# Altium PCB PCB2_third.PCBDOC (part 1 of 3)
Units mil, origin at the board's own origin, x right, y up, seen from the top; angles counter-clockwise.
Board outline 6000 x 4000 mil, 2 copper layers (Top Layer, Bottom Layer); 72 components, 143 nets, 481 pads, 207 vias.
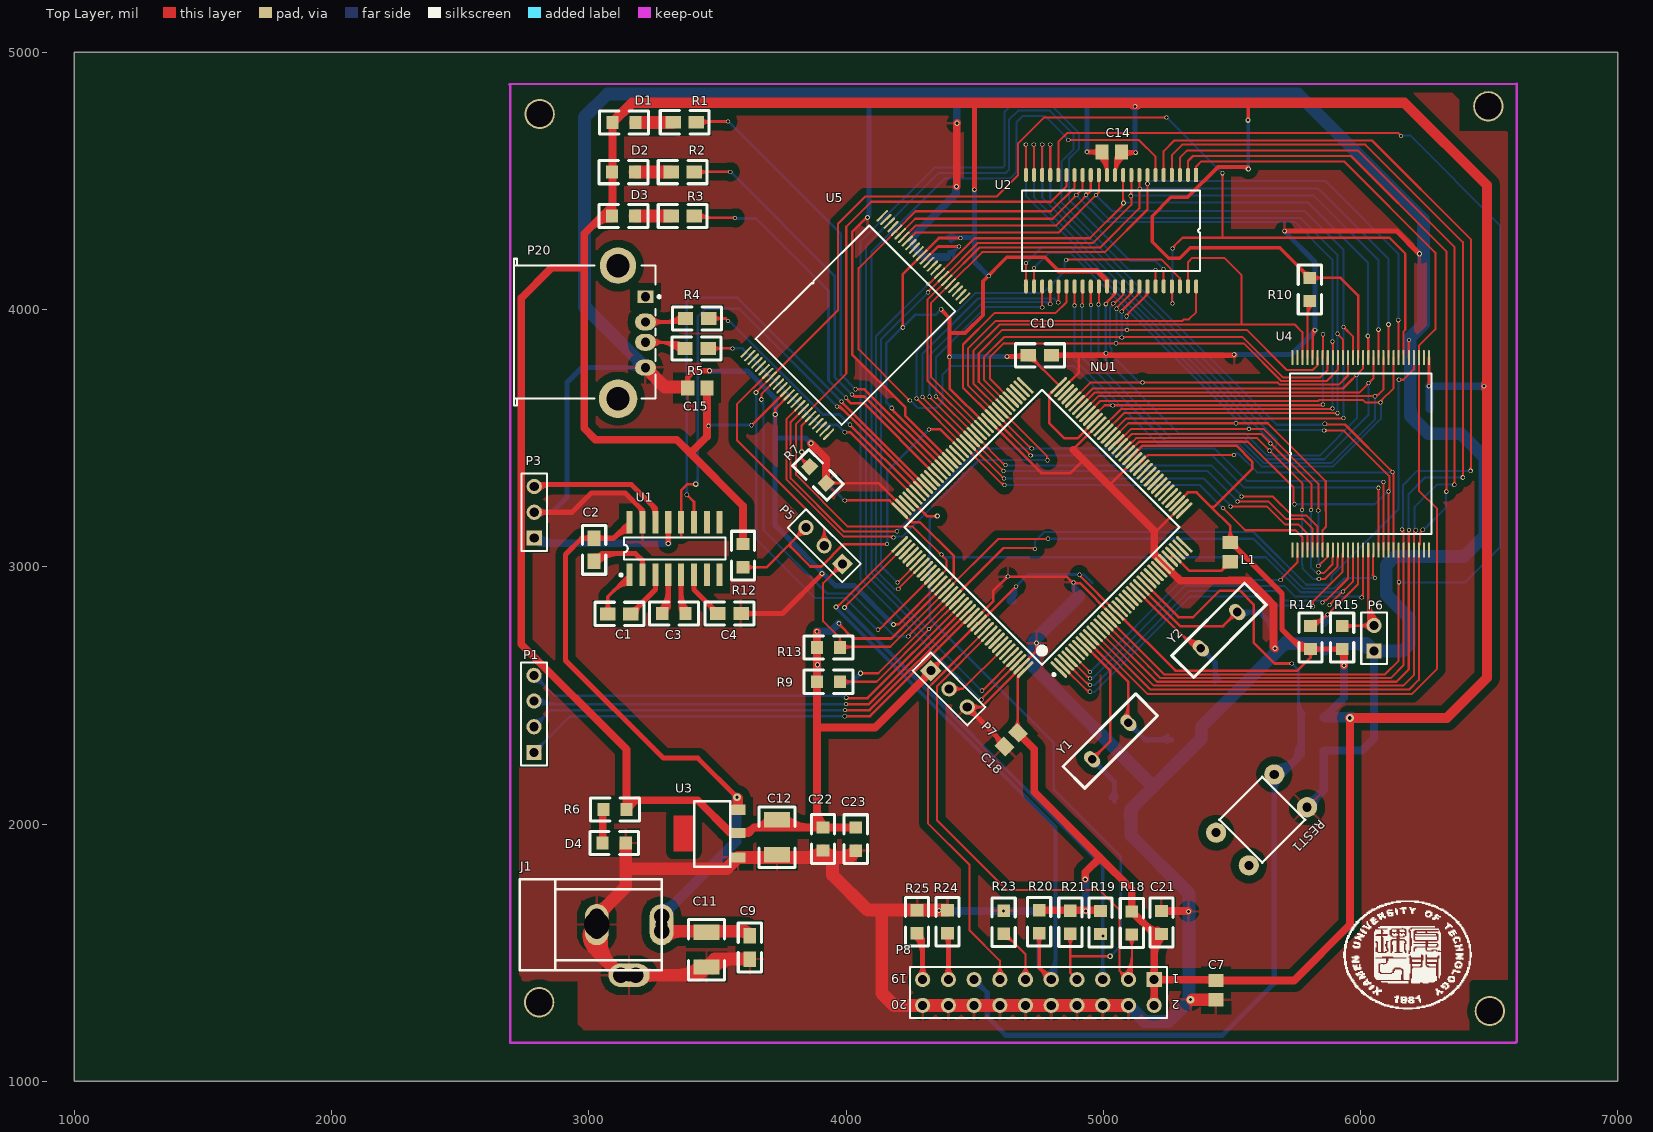
[diagram p0: Top Layer view]
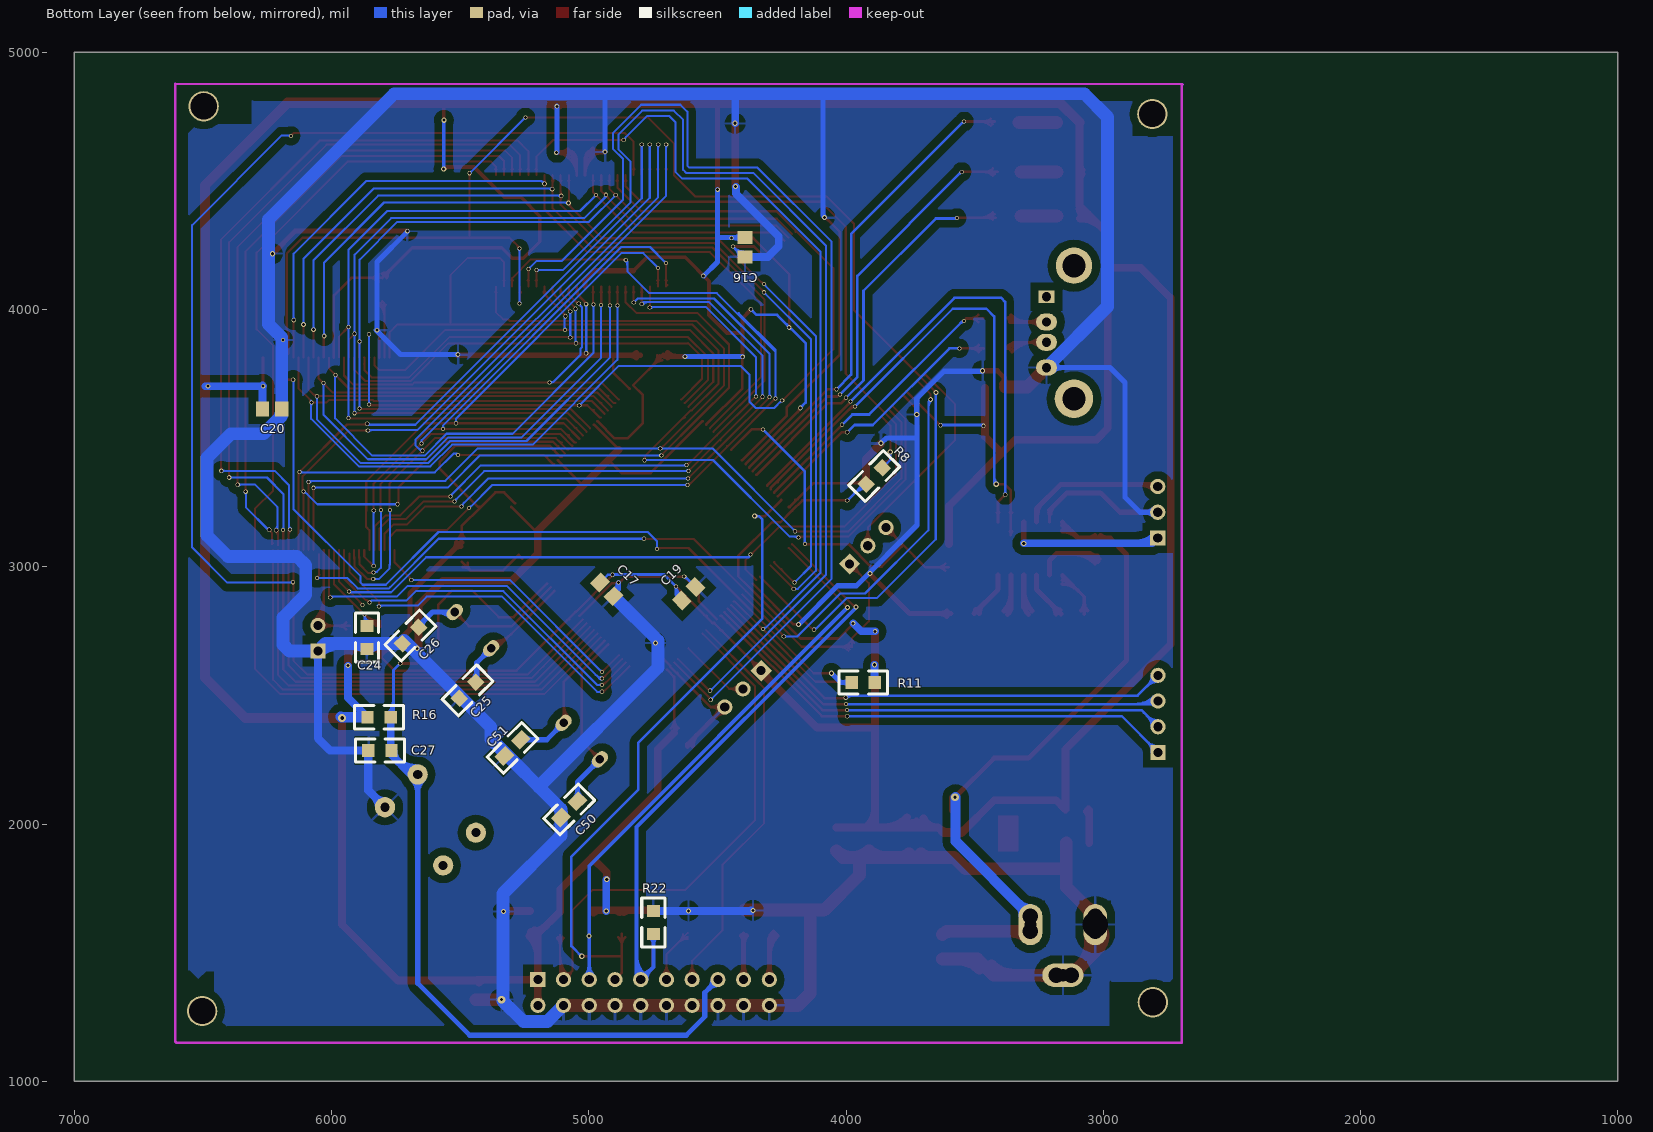
[diagram p1: Bottom Layer view, seen from below]

## Layer stack, top to bottom
Top Layer: signal copper 1.4
Dielectric: core 12.6, FR-4, Dk 4.8
Bottom Layer: signal copper 1.4

## Board outline
1000,1000 7000,1000 7000,5000 1000,5000

## Design rules (kind name [scope] priority, off if disabled: settings)
Clearance [All] p1: gap=6
ComponentClearance [All] p1: gap=10 collisioncheckmode=3 verticalgap=10
PolygonConnect [All] p1: connectstyle=Relief reliefconductorwidth=10 reliefentries=4 polygonreliefangle="90 Angle"
RoutingVias [All] p1: holewidth=28 width=50 viastyle="Through Hole" minholewidth=28 minwidth=50 maxholewidth=28 maxwidth=50
SolderMaskExpansion [All] p1: expansion=4
TestPointUsage [All] p1: valid=0 allowmultiple=FALSE
Testpoint [All] p1: side=15 testpointundercomponent=TRUE minsize=40 maxsize=100 preferedsize=60 minholesize=0 maxholesize=40 preferedholesize=32 testpointgrid=1 style=1023 order=0123456789
Width [All] p1: maxlimit=50 minlimit=6 preferedwidth=10 minimp=50.000000 maximp=50.000000 favimp=50.000000
18 further rules are at their usual default settings.

## Classes and differential pairs
net class R3_Nets: NetD3_2 PC8
net class R2_Nets: NetD2_2 PC7
net class R1_Nets: NetD1_2 PC6
net class R19_Nets: PA15 VDD33
net class U4_Nets: A0 A1 A2 A3 A4 A5 A6 A7 A8 A9 A10 A11 A12 A13 A14 A15 A16 A17 A18 A19 A20 A21 A22 D0 D1 D2 D3 D4 D5 D6 D7 D8 D9 D10 D11 D12 D13 D14 D15 GND NetC24_1 NetP6_2 NetR10_1 NetU4_1 NetU4_27 NetU4_28 NetU4_30 NetU4_55 NetU4_56 PD4 PD5 PD6 PG9 VDD33
net class D[0..15]: AD0 AD1 AD2 AD3 AD4 AD5 AD6 AD7 AD8 AD9 AD10 AD11 AD12 AD13 AD14 AD15 AD16 AD17 AD18 AD19 AD20 AD21 AD22 AD23 D0 D1 D2 D3 D4 D5 D6 D7 D8 D9 D10 D11 D12 D13 D14 D15 DATA0 DATA1 DATA2 DATA3 DATA4 DATA5 DATA6 DATA7 DATA8 DATA9 DATA10 DATA11 DATA12 DATA13 DATA14 DATA15 NetU4_1 NetU4_27 NetU4_28 NetU4_30 NetU4_55 NetU4_56
net class U5_Nets: A16 A17 D0 D1 D2 D3 D4 D5 D6 D7 GND NetP5_2 NetR7_1 PD4 PD5 PD7 VDD33
net class A[0..23]: A0 A1 A2 A3 A4 A5 A6 A7 A8 A9 A10 A11 A12 A13 A14 A15 A16 A17 A18 A19 A20 A21 A22 A23 NetU4_1 NetU4_27 NetU4_28 NetU4_30 NetU4_55 NetU4_56
net class U3_Nets: GND VDD5 VDD33
net class U2_Nets: A0 A1 A2 A3 A4 A5 A6 A7 A8 A9 A10 A11 A12 A13 A14 A15 A16 A17 A18 D0 D1 D2 D3 D4 D5 D6 D7 D8 D9 D10 D11 D12 D13 D14 D15 GND PD4 PD5 PE0 PE1 PG10 VDD33
net class REST1_Nets: GND NRST
net class R25_Nets: GND NetP8_19
net class R24_Nets: GND NetP8_17
net class R23_Nets: GND NetP8_11
net class R22_Nets: GND PA14
net class R21_Nets: PA13 VDD33
net class R20_Nets: PA14 VDD33
net class R18_Nets: PB4 VDD33
net class R16_Nets: NRST VDD33
net class R15_Nets: NetP6_2 VDD33
net class R14_Nets: NetC24_1 VDD33
net class R13_Nets: PD6 VDD33
net class R12_Nets: PG6 VDD33
net class R11_Nets: PG9 VDD33
net class R10_Nets: NetR10_1 VDD33
net class R9_Nets: PG10 VDD33
net class R8_Nets: NetR7_1 VDD33
net class R7_Nets: GND NetR7_1
net class R6_Nets: NetD4_1 VDD33
net class R5_Nets: NetP20_3 PA12
net class R4_Nets: NetP20_2 PA11
net class P20_Nets: GND NetP20_2 NetP20_3 NetP20_5 NetP20_6 "USB 5V"
net class P8_Nets: GND NetP8_11 NetP8_17 NetP8_19 NRST PA13 PA14 PA15 PB3 PB4 VDD33
net class P7_Nets: BOOT0 GND VDD33
net class P6_Nets: GND NetP6_2
net class P5_Nets: NetP5_2 PD6 PG6
net class P3_Nets: GND R1IN T1OUT
net class NU1_Nets: A0 A1 A2 A3 A4 A5 A6 A7 A8 A9 A10 A11 A12 A13 A14 A15 A16 A17 A18 A19 A20 A21 A22 A23 BOOT0 D0 D1 D2 D3 D4 D5 D6 D7 D8 D9 D10 D11 D12 D13 D14 D15 GND LED0 LED1 LED2 NetL1_1 NetNU1_6 NetNU1_106 NRST OSCIN OSCOUT PA0 PA1 PA2 PA3 PA4 PA5 PA6 PA7 PA8 PA9 PA10 PA11 PA12 PA13 PA14 PA15 PB0 PB1 PB2 PB3 PB4 PB5 PB6 PB7 PB8 PB9 PB10 PB11 PB12 PB13 PB14 PB15 PC0 PC1 PC2 PC3 PC4 PC5 PC6 PC7 PC8 PC9 PC10 PC11 PC12 PC13 PC14 PC15 PD2 PD3 PD4 PD5 PD6 PD7 PE0 PE1 PF6 PF10 PF11 PG6 PG7 PG8 PG9 PG10 PG11 PG12 PG13 PG14 PG15 VDD33
net class L1_Nets: NetL1_1 VDD33
net class J1_Nets: GND VDD5
net class D4_Nets: GND NetD4_1
net class D3_Nets: NetD3_2 VDD33
net class D2_Nets: NetD2_2 VDD33
net class D1_Nets: NetD1_2 VDD33
net class C27_Nets: GND NRST
net class C25_Nets: GND OSCIN
net class C24_Nets: GND NetC24_1
net class C23_Nets: GND VDD33
net class C22_Nets: GND VDD33
net class C21_Nets: GND VDD33
net class C20_Nets: GND VDD33
net class C19_Nets: GND VDD33
net class C18_Nets: GND VDD33
net class C17_Nets: GND VDD33
net class C16_Nets: GND VDD33
net class C15_Nets: GND VDD33
net class C14_Nets: GND VDD33
net class C12_Nets: GND VDD33
net class C11_Nets: GND VDD5
net class C10_Nets: GND VDD33
net class C9_Nets: GND VDD5
net class C7_Nets: GND VDD33
net class C3_Nets: NetC3_1 NetC3_2
net class C1_Nets: NetC1_1 NetC1_2
component class "XLAT AND JTAG": C25 C26 C27 P7 P8 R16 R18 R19 R20 R21 R22 R23 R24 R25 REST1 Y2
component class STORAGE: C21 C22 C23 C24 P5 P6 R7 R8 R9 R10 R11 R12 R13 R14 R15 U2 U4 U5
component class POWER: C7 C9 C10 C11 C12 C14 C15 C16 C17 C18 C19 C20 D4 J1 L1 NU1 R6 U3
component class EXTERN: 1 C1 C2 C3 C4 D1 D2 D3 P1 P3 P20 R1 R2 R3 R4 R5 U1
net class C2_Nets: NetC2_2 VDD5
net class C4_Nets: GND NetC4_1
net class U1_Nets: GND NetC1_1 NetC1_2 NetC2_2 NetC3_1 NetC3_2 NetC4_1 NetU1_7 NetU1_8 NetU1_9 NetU1_10 PA9 PA10 R1IN T1OUT VDD5
net class C26_Nets: GND OSCOUT
net class Y2_Nets: OSCIN OSCOUT
component class GPIO_OUT: C50 C51 Y1
net class C50_Nets: GND PC14
net class C51_Nets: GND PC15
net class Y1_Nets: PC14 PC15
net class P1_Nets: PG11 PG12 PG13 PG14

## Components (designator, comment, footprint, x,y, rotation, side; value= is the part's Value field where it differs from the comment)
C1 "0.1uF" 0805#1 3074,2817 r0 top
C2 "0.1uF" 0805#1 3021,3111 r270 top
C3 "0.1uF" 0805#2 3376,2818 r180 top
C4 "0.1uF" 0805#1 3502,2818 r0 top
C7 "Cap" 6-0805 5438,1354 r90 top
C9 "102" 0805#1 3626,1565 r270 top
C10 "102" 0805#1 4709,3822 r0 top
C11 "2.2uf" 1210 3458,1579 r270 top
C12 "2.2uf" 1210 3732,2016 r270 top
C14 "Cap" 6-0805 5033,4612 r0 top
C15 "Cap" 6-0805 3422,3695 r0 top
C16 "Cap" 6-0805 4393,4242 r90 bottom
C17 "Cap" 6-0805 4930,2912 r45 bottom
C18 "Cap" 6-0805 4642,2328 r45 top
C19 "Cap" 6-0805 4612,2895 r315 bottom
C20 "Cap" 6-0805 6231,3613 r0 bottom
C21 "Cap" 0805#2 5227,1572 r90 top
C22 "Cap" 0805#2 3911,1987 r270 top
C23 "Cap" 0805#2 4038,1986 r270 top
C24 "Cap" 0805#2 5862,2770 r270 bottom
C25 "Cap" 0805#2 5503,2488 r135 bottom
C26 "Cap" 0805#2 5725,2701 r135 bottom
C27 "Cap" 0805#2 5857,2286 r180 bottom
C50 "Cap" 0805#1 5108,2025 r135 bottom
C51 "Cap" 0805#1 5328,2264 r135 bottom
D1 "LED0" 0805#2 3092,4727 r0 top
D2 "LED0" 0805#2 3090,4534 r0 top
D3 "LED0" 0805#2 3090,4364 r0 top
D4 "LED3" 0805#2 3054,1926 r0 top
J1 "PWR2.5" Power_In 3013,1699 r0 top
L1 "Inductor" 6-0805 5494,3057 r90 top
NU1 "STM32F103ZET6" LQFN144 4762,3153 r135 top
P1 "Header 4" HDR1X4 2787,2278 r90 top
P3 "Header 3" HDR1X3 2788,3112 r90 top
P5 "Header 3" HDR1X3 3986,3011 r135 top
P6 "Header 2" HDR1X2 6053,2672 r90 top
P7 "Header 3" HDR1X3 4330,2596 r315 top
P8 "Header 10X2" HDR2X10 5198,1395 r180 top
P20 "P10" 787616 2709,3912 r180 top
R1 "Res2" 0805#1 3418,4728 r180 top
R2 "Res2" 0805#1 3410,4534 r180 top
R3 "Res2" 0805#1 3410,4364 r180 top
R4 "Res2" 0805#1 3376,3965 r0 top
R5 "Res2" 0805#1 3374,3848 r0 top
R6 "Res2" 0805#2 3057,2056 r0 top
R7 "Res2" 0805#2 3859,3389 r315 top
R8 "Res2" 0805#2 3922,3321 r135 bottom
R9 "Res2" 0805#2 3977,2553 r180 top
R10 "Res2" 0805#2 5803,4033 r90 top
R11 "Res2" 0805#2 3978,2550 r180 bottom
R12 "Res2" 0805#2 3600,2998 r90 top
R13 "Res2" 0805#2 3887,2686 r0 top
R14 "Res2" 0805#2 5806,2680 r90 top
R15 "Res2" 0805#2 5929,2680 r90 top
R16 "Res2" 0805#2 5770,2415 r0 bottom
R18 "Res2" 0805#2 5111,1570 r90 top
R19 "Res2" 0805#2 4989,1572 r90 top
R20 "Res2" 0805#2 4751,1575 r90 top
R21 "Res2" 0805#2 4872,1573 r90 top
R22 "Res2" 0805#2 4749,1572 r90 bottom
R23 "Res2" 0805#2 4613,1573 r90 top
R24 "Res2" 0805#2 4395,1575 r90 top
R25 "Res2" 0805#2 4276,1575 r90 top
REST1 "SW_PB" SWPB 5566,1839 r225 top
U1 "MAX232-2" SOIC16 3334,3071 r0 top
U2 "IS61LV51216-10T" TSOP44 5361,4523 r270 top
U3 "LM1117-3.3" SOT-223 3410,1833 r90 top
U4 "M29W128GL" TSOP56 5735,3065 r90 top
U5 "NAND512W3A2CN6E" TSOP48 3612,3835 r45 top
Y1 "XTAL" XTAL-1 5098,2393 r225 top
Y2 "XTAL" XTAL-1 5521,2824 r225 top
? "" BMP1 5935,1705 r0 top

## Footprints (in the part's own frame and the unit in brackets; to place one, negate y for a bottom-side part, rotate by r counter-clockwise, add the part's x,y. Pads: shape width x height; smd on the part's side, far side on the other; paste and mask are expansions set on the pad)
6-0805 [mm] "Chip Resistor; Body 2.0 x 1.3 mm (LxW typ)"
  rect 1.3x1.5 smd: 1(-0.95,0) 2(0.95,0)
0805#1 [mil]
  rect 60x50 smd: 1(0,0) 2(90,0)
  silkscreen extent -50,-45 140,45
0805#2 [mil]
  rect 47.37x50 smd: 1(0,0) 2(90,0)
  silkscreen extent -50,-45 140,45
1210 [mil]
  rect 60x100 smd: 1(0,0) 2(135,0)
  silkscreen extent -50,-70 185,70
787616 [mm] "Connector; USB1.1, Type A, Thru-Hole; 4 Position; Right Angle"
  rect 1.606x1.2 hole 0.92: 1(-12.99,-3.5)
  oval 2.057x1.676 hole 0.92: 2(-12.99,-1) 3(-12.99,1)
  oval 2.057x1.6 hole 0.92: 4(-12.99,3.5)
  round 3.8 hole 2.3: 5(-10.28,6.57)
  round 3.6 hole 2.3: 6(-10.28,-6.57)
  silkscreen extent -14.47,-7.25 0,7.25
BMP1 [mil]
  silkscreen extent 0,-424 498,-4
HDR1X2 [mm] "Connector; Header; 2 Position"
  rect 1.5x1.5 hole 0.9: 1(0,0)
  round 1.5 hole 0.9: 2(2.54,0)
  silkscreen extent -1.27,-1.27 3.81,1.27
HDR1X3 [mm] "Connector; Header; 3 Position"
  rect 1.5x1.5 hole 0.9: 1(0,0)
  round 1.5 hole 0.9: 2(2.54,0) 3(5.08,0)
  silkscreen extent -1.27,-1.27 6.35,1.27
HDR1X4 [mm] "Connector; Header; 4 Position"
  rect 1.5x1.5 hole 0.9: 1(0,0)
  round 1.5 hole 0.9: 2(2.54,0) 3(5.08,0) 4(7.62,0)
  silkscreen extent -1.27,-1.27 8.89,1.27
HDR2X10 [mm] "Connector; Header; 10x2 Position"
  rect 1.5x1.5 hole 0.9: 1(0,0)
  round 1.5 hole 0.9: 2(0,2.54) 3(2.54,0) 4(2.54,2.54) 5(5.08,0) 6(5.08,2.54) 7(7.62,0) 8(7.62,2.54) 9(10.16,0) 10(10.16,2.54) 11(12.7,0) 12(12.7,2.54) 13(15.24,0) 14(15.24,2.54) 15(17.78,0) 16(17.78,2.54) 17(20.32,0) 18(20.32,2.54) 19(22.86,0) 20(22.86,2.54)
  silkscreen extent -1.27,-1.27 24.13,3.81
LQFN144 [mm] "TSQFP, 144-Leads, Body 23.8x23.8mm (max), Pitch 0.50mm, IPC Medium Density"
  oval 2.2x0.3 smd: 1(-11.1,8.75) 2(-11.1,8.25) 3(-11.1,7.75) 4(-11.1,7.25) 5(-11.1,6.75) 6(-11.1,6.25) 7(-11.1,5.75) 8(-11.1,5.25) 9(-11.1,4.75) 10(-11.1,4.25) 11(-11.1,3.75) 12(-11.1,3.25) 13(-11.1,2.75) 14(-11.1,2.25) 15(-11.1,1.75) 16(-11.1,1.25) 17(-11.1,0.75) 18(-11.1,0.25) 19(-11.1,-0.25) 20(-11.1,-0.75) 21(-11.1,-1.25) 22(-11.1,-1.75) 23(-11.1,-2.25) 24(-11.1,-2.75) 25(-11.1,-3.25) 26(-11.1,-3.75) 27(-11.1,-4.25) 28(-11.1,-4.75) 29(-11.1,-5.25) 30(-11.1,-5.75) 31(-11.1,-6.25) 32(-11.1,-6.75) 33(-11.1,-7.25) 34(-11.1,-7.75) 35(-11.1,-8.25) 36(-11.1,-8.75) 73(11.1,-8.75) 74(11.1,-8.25) 75(11.1,-7.75) 76(11.1,-7.25) 77(11.1,-6.75) 78(11.1,-6.25) 79(11.1,-5.75) 80(11.1,-5.25) 81(11.1,-4.75) 82(11.1,-4.25) 83(11.1,-3.75) 84(11.1,-3.25) 85(11.1,-2.75) 86(11.1,-2.25) 87(11.1,-1.75) 88(11.1,-1.25) 89(11.1,-0.75) 90(11.1,-0.25) 91(11.1,0.25) 92(11.1,0.75) 93(11.1,1.25) 94(11.1,1.75) 95(11.1,2.25) 96(11.1,2.75) 97(11.1,3.25) 98(11.1,3.75) 99(11.1,4.25) 100(11.1,4.75) 101(11.1,5.25) 102(11.1,5.75) 103(11.1,6.25) 104(11.1,6.75) 105(11.1,7.25) 106(11.1,7.75) 107(11.1,8.25) 108(11.1,8.75)
  oval 0.3x2.2 smd: 37(-8.75,-11.1) 38(-8.25,-11.1) 39(-7.75,-11.1) 40(-7.25,-11.1) 41(-6.75,-11.1) 42(-6.25,-11.1) 43(-5.75,-11.1) 44(-5.25,-11.1) 45(-4.75,-11.1) 46(-4.25,-11.1) 47(-3.75,-11.1) 48(-3.25,-11.1) 49(-2.75,-11.1) 50(-2.25,-11.1) 51(-1.75,-11.1) 52(-1.25,-11.1) 53(-0.75,-11.1) 54(-0.25,-11.1) 55(0.25,-11.1) 56(0.75,-11.1) 57(1.25,-11.1) 58(1.75,-11.1) 59(2.25,-11.1) 60(2.75,-11.1) 61(3.25,-11.1) 62(3.75,-11.1) 63(4.25,-11.1) 64(4.75,-11.1) 65(5.25,-11.1) 66(5.75,-11.1) 67(6.25,-11.1) 68(6.75,-11.1) 69(7.25,-11.1) 70(7.75,-11.1) 71(8.25,-11.1) 72(8.75,-11.1) 109(8.75,11.1) 110(8.25,11.1) 111(7.75,11.1) 112(7.25,11.1) 113(6.75,11.1) 114(6.25,11.1) 115(5.75,11.1) 116(5.25,11.1) 117(4.75,11.1) 118(4.25,11.1) 119(3.75,11.1) 120(3.25,11.1) 121(2.75,11.1) 122(2.25,11.1) 123(1.75,11.1) 124(1.25,11.1) 125(0.75,11.1) 126(0.25,11.1) 127(-0.25,11.1) 128(-0.75,11.1) 129(-1.25,11.1) 130(-1.75,11.1) 131(-2.25,11.1) 132(-2.75,11.1) 133(-3.25,11.1) 134(-3.75,11.1) 135(-4.25,11.1) 136(-4.75,11.1) 137(-5.25,11.1) 138(-5.75,11.1) 139(-6.25,11.1) 140(-6.75,11.1) 141(-7.25,11.1) 142(-7.75,11.1) 143(-8.25,11.1) 144(-8.75,11.1)
  silkscreen extent -11.22,-9.6 9.6,9.6, body extent -10,-10 10,10, height 1.6
Power_In [mil]
  rect 60x60 hole 60: 1(270,-116) 2(170,-287) 3(18,-57)
  oval 92x160 hole 47: 1(270,-90)
  rect 50x60 hole 60: 1(270,-57) 3(18,-116)
  rect 60x50 hole 60: 2(111,-287)
  oval 160x92 hole 47: 2(144,-287)
  oval 92x160 hole 100: 3(18,-90)
  silkscreen extent -281,-267 270,87
SOIC16 [mm]
  rect 0.6x2.2 smd: 1(-4.445,-2.6) 2(-3.175,-2.6) 3(-1.905,-2.6) 4(-0.635,-2.6) 5(0.635,-2.6) 6(1.905,-2.6) 7(3.175,-2.6) 8(4.445,-2.6) 9(4.445,2.6) 10(3.175,2.6) 11(1.905,2.6) 12(0.635,2.6) 13(-0.635,2.6) 14(-1.905,2.6) 15(-3.175,2.6) 16(-4.445,2.6)
  silkscreen extent -5.42,-2.72 5,1.1
SOT-223 [mm]
  rect 1x1.5 smd: 1(0.95,-4.31) 2(3.35,-4.31) 3(5.65,-4.31)
  Top Layer region: 1.524,0 5.08,0 5.08,2.032 1.524,2.032
  silkscreen extent 0,-3.56 6.5,0
SWPB [mm]
  round 2 hole 0.9: 1(-8.128,0) 2(-8.128,-4.572) 3(0,-4.572) 4(0,0)
  silkscreen extent -7.13,-5.25 -1.13,0.75
TSOP44 [mm]
  rect 1.4x0.4 smd: 1(0,0)
  oval 1.4x0.4 smd: 2(0,-0.8) 3(0,-1.6) 4(0,-2.4) 5(0,-3.2) 6(0,-4) 7(0,-4.8) 8(0,-5.6) 9(0,-6.4) 10(0,-7.2) 11(0,-8) 12(0,-8.8) 13(0,-9.6) 14(0,-10.4) 15(0,-11.2) 16(0,-12) 17(0,-12.8) 18(0,-13.6) 19(0,-14.4) 20(0,-15.2) 21(0,-16) 22(0,-16.8) 23(11,-16.8) 24(11,-16) 25(11,-15.2) 26(11,-14.4) 27(11,-13.6) 28(11,-12.8) 29(11,-12) 30(11,-11.2) 31(11,-10.4) 32(11,-9.6) 33(11,-8.8) 34(11,-8) 35(11,-7.2) 36(11,-6.4) 37(11,-5.6) 38(11,-4.8) 39(11,-4) 40(11,-3.2) 41(11,-2.4) 42(11,-1.6) 43(11,-0.8) 44(11,0)
  silkscreen extent 1.53,-17.2 9.47,0.4
TSOP48 [mm]
  rect 1.5x0.22 smd: 1(0,0)
  oval 1.5x0.22 smd: 2(0,-0.5) 3(0,-1) 4(0,-1.5) 5(0,-2) 6(0,-2.5) 7(0,-3) 8(0,-3.5) 9(0,-4) 10(0,-4.5) 11(0,-5) 12(0,-5.5) 13(0,-6) 14(0,-6.5) 15(0,-7) 16(0,-7.5) 17(0,-8) 18(0,-8.5) 19(0,-9) 20(0,-9.5) 21(0,-10) 22(0,-10.5) 23(0,-11) 24(0,-11.5) 25(19,-11.5) 26(19,-11) 27(19,-10.5) 28(19,-10) 29(19,-9.5) 30(19,-9) 31(19,-8.5) 32(19,-8) 33(19,-7.5) 34(19,-7) 35(19,-6.5) 36(19,-6) 37(19,-5.5) 38(19,-5) 39(19,-4.5) 40(19,-4) 41(19,-3.5) 42(19,-3) 43(19,-2.5) 44(19,-2) 45(19,-1.5) 46(19,-1) 47(19,-0.5) 48(19,0)
  silkscreen extent 1.58,-11.75 17.42,0.25
TSOP56 [mm]
  rect 1.5x0.2 smd: 1(0,0)
  oval 1.5x0.2 smd: 2(0,-0.5) 3(0,-1) 4(0,-1.5) 5(0,-2) 6(0,-2.5) 7(0,-3) 8(0,-3.5) 9(0,-4) 10(0,-4.5) 11(0,-5) 12(0,-5.5) 13(0,-6) 14(0,-6.5) 15(0,-7) 16(0,-7.5) 17(0,-8) 18(0,-8.5) 19(0,-9) 20(0,-9.5) 21(0,-10) 22(0,-10.5) 23(0,-11) 24(0,-11.5) 25(0,-12) 26(0,-12.5) 27(0,-13) 28(0,-13.5) 29(19,-13.5) 30(19,-13) 31(19,-12.5) 32(19,-12) 33(19,-11.5) 34(19,-11) 35(19,-10.5) 36(19,-10) 37(19,-9.5) 38(19,-9) 39(19,-8.5) 40(19,-8) 41(19,-7.5) 42(19,-7) 43(19,-6.5) 44(19,-6) 45(19,-5.5) 46(19,-5) 47(19,-4.5) 48(19,-4) 49(19,-3.5) 50(19,-3) 51(19,-2.5) 52(19,-2) 53(19,-1.5) 54(19,-1) 55(19,-0.5) 56(19,0)
  silkscreen extent 1.58,-13.75 17.42,0.25
XTAL-1 [mm]
  oval 1.203x1.8 hole 0.85: 1(0,0) 2(5.08,0)
  silkscreen extent -2.54,-1.52 7.62,1.52

## Part data
C1 C2 C3 C4 C9 C10 C11 C12: library part CAP, "Capacitor"
C7 C14 C15 C16 C17 C18 C19 C20 C21 C22 C23 C24 C25 C26 C27 C50 C51: "Capacitor"
D1 D2 D3: "Typical INFRARED GaAs LED"
D4: "Typical BLUE SiC LED"
J1: "Low Voltage Power Supply Connector"
P1: "Header, 4-Pin"
P3 P5 P7: "Header, 3-Pin"
P6: "Header, 2-Pin"
P8: "Header, 10-Pin, Dual row"
P20: library part COMPONENT_1
R1 R2 R3 R4 R5 R6 R7 R8 R9 R10 R11 R12 R13 R14 R15 R16 R18 R19 R20 R21 R22 R23 R24 R25: "Resistor"
U1: library part MAX3232-2
Y1 Y2: "Crystal Oscillator"

## Free pads (board coordinates)
  round 118.11 hole 102.36: 0(6497,4790) 1(6503,1273) 2(2809,4760) 3(2807,1307)

## Via types
v1: diameter 16, hole 12, Top Layer to Bottom Layer, 141 vias
v2: diameter 18, hole 12, Top Layer to Bottom Layer, 34 vias
v3: diameter 20, hole 12, Top Layer to Bottom Layer, 29 vias
v4: diameter 30, hole 12, Top Layer to Bottom Layer, 2 vias
v5: diameter 30, hole 14, Top Layer to Bottom Layer, 1 vias

## Nets (pads, with @x,y where several pads share a name; then routed paths per layer and width w, separated by ;. In a path a pad name is that pad's centre, name@x,y a point inside that pad or via, vN(x,y) a via of type N, cw(c..) or ccw(c..) an arc to the next point about the centre after c; other vN are vias at no path point)
A0: NU1.10 U2.1 U4.31 | length 4284.1
  Top Layer w8: NU1.10@4952.7,2725.67 5173.37,2505 6200,2505 6298,2603 6298,3225 6227.12,3295.88 U4.31@6227.12,3813.03 6227.12,3859.12 6291,3923 6291,4221 5936,4576 5381,4576 5361,4556 U2.1@5361,4523 ; U2.1@5358.26,4545.42 ccw(c5351.65,4552.04) 5361,4552.04 ccw(c5370.35,4552.04) U2.1@5363.74,4545.42
A1: NU1.11 U2.2 U4.26 | length 4361.7
  Top Layer w8: NU1.11@4966.62,2739.59 5183.21,2523 6190,2523 6227.12,2560.12 U4.26@6227.12,3065 ; U2.2@5326.76,4545.42 ccw(c5320.15,4552.04) 5329.5,4552.04 ccw(c5338.86,4552.04) U2.2@5332.24,4545.42 ; U2.2@5329.5,4523 5329.5,4577.5 5349,4597 5963,4597 6333.69,4226.31 v2@6333.69,3290.32 ; U4.26@6227.17,3090.55 ccw(c6217.92,3099.79) 6231,3099.79 ; U4.26@6231,3087 6231,3131 v1@6244,3144 ; 6233.76,3133.76 ccw(c6223.51,3144) v1@6238,3144 ; v2@6330.46,3295.54 ccw(c6322.69,3303.31) 6333.69,3303.31 ; 6333.69,3304.83 ccw(c6346.83,3304.83) v2@6337.54,3295.54
  Bottom Layer w8: v1@6242,3148 ccw(c6242,3167.31) 6255.66,3153.66 ; v1@6244,3145 6247,3145 6332,3230 v2@6332,3294 ; 6332,3275.1 cw(c6350.9,3275.1) v2@6337.54,3288.46
  other v1: 6242,3144
  other v2: 6334,3292
A2: NU1.12 U2.3 U4.25 | length 4519.6
  Top Layer w8: NU1.12@4980.53,2753.51 5146.52,2587.52 ; 5151,2583.05 5146.52,2587.52 ; U2.3@5295.27,4545.42 ccw(c5288.66,4552.04) 5298.01,4552.04 ccw(c5307.36,4552.04) U2.3@5300.75,4545.42 ; U2.3@5298.01,4523 5298.01,4590.01 5327,4619 5989,4619 6366,4242 v2@6366,3320 ; U4.25@6207.44,3065 6207.44,2578.44 6168,2539 5195.05,2539 5146.52,2587.52 ; U4.25@6208,3083 6208,3133 v1@6214,3139 ; 6208,3115.44 cw(c6241.56,3115.44) v1@6217.83,3139.17 ; 6208,3130.6 cw(c6215.41,3130.6) v1@6215.14,3138 ; 6208,3134.76 cw(c6222.24,3134.76) v1@6212.17,3144.83 ; 6209,3134 ccw(c6203.52,3139.49) v1@6211.09,3141.14 ; v2@6361.46,3322.54 ccw(c6350.51,3333.49) 6366,3333.49 ; 6366,3328.66 ccw(c6374.66,3328.66) v2@6368.54,3322.54
  Bottom Layer w8: 6210,3163.73 ccw(c6236.73,3163.73) v1@6217.83,3144.83 ; 6210,3233 6210,3149 v1@6215,3144 ; 6211,3233 6297,3319 v2(6365,3319) ; v2@6361.46,3315.46 ccw(c6352.93,3306.93) 6352.93,3319 ccw(c6352.93,3331.07) v2@6361.46,3322.54
  other v1: 6215,3142
A3: NU1.13 U2.4 U4.24 | length 4598.6
  Top Layer w8: NU1.13@4994.45,2767.43 5208.89,2553 6140,2553 6187.76,2600.76 U4.24@6187.76,3065 6187.76,3142.76 v1(6188,3143) ; U2.4@5263.77,4545.42 ccw(c5257.16,4552.04) 5266.51,4552.04 ccw(c5275.86,4552.04) U2.4@5269.25,4545.42 ; U2.4@5266.51,4523 5266.51,4600.51 5307,4641 6019,4641 6398,4262 v2(6398,3347) ; v1@6185.17,3140.17 cw(c6178.93,3133.93) 6187.75,3133.93 ; 6187.76,3132.75 cw(c6198.25,3132.75) v1@6190.83,3140.17 ; v2@6394.46,3350.54 ccw(c6385.93,3359.07) 6398,3359.07 ccw(c6410.07,3359.07) v2@6401.54,3350.54
  Bottom Layer w8: v1@6187,3142 6187,3283 6251,3347 v2(6398,3347) ; 6187,3155.07 ccw(c6200.07,3155.07) v1@6190.83,3145.83 ; v2@6394.46,3343.46 ccw(c6385.93,3334.93) 6385.93,3347 ccw(c6385.93,3359.07) v2@6394.46,3350.54
A4: NU1.14 U2.5 U4.23 | length 4761.8
  Top Layer w8: NU1.14@5008.37,2781.35 5174.86,2614.86 ; 5178.73,2611 5174.86,2614.86 ; U2.5@5232.28,4545.42 ccw(c5225.66,4552.04) 5235.02,4552.04 ccw(c5244.37,4552.04) U2.5@5237.75,4545.42 ; U2.5@5235.02,4523 5235.02,4616.02 5276,4657 6045,4657 6429,4273 v2@6429,3374 ; v1@6158.17,3142.17 cw(c6134.27,3118.27) 6168.07,3118.27 ; v1@6160,3147 6167,3140 6168,3140 ; v1(6161,3145) v1@6162.41,3144.59 ; v1@6163.83,3147.83 cw(c6153.59,3137.59) 6168.07,3137.59 ; 6168.07,3140 U4.23@6168.07,3065 6168.07,2618.07 6117,2567 5222.73,2567 5174.86,2614.86 ; v2@6424.46,3376.54 ccw(c6413.51,3387.49) 6429,3387.49 ; 6429,3382.66 ccw(c6437.66,3382.66) v2@6431.54,3376.54
  Bottom Layer w8: v1@6158.17,3147.83 ccw(c6139.27,3166.73) 6166,3166.73 ; v1@6160.58,3148.98 ccw(c6159.94,3155) 6166,3155 ; v1@6163,3142 6163,3152 6166,3155 ; v1@6164.6,3146.74 cw(c6171.11,3149.89) 6166,3155 ; 6166,3317 6166,3155 ; 6166,3318 6221,3373 v2(6428,3373) ; v2@6424.46,3369.46 ccw(c6415.93,3360.93) 6415.93,3373 ccw(c6415.93,3385.07) v2@6424.46,3376.54
A5: NU1.15 U2.18 U4.22 | length 5457.9
  Top Layer w8: U2.18@4822.83,4545.42 ccw(c4816.21,4552.04) 4825.57,4552.04 ccw(c4834.92,4552.04) U2.18@4828.31,4545.42 ; U2.18@4825.57,4523 4825.57,4651.57 4861,4687 6146,4687 v1(6158,4675) ; NU1.15@5022.29,2795.27 5236.56,2581 6094,2581 6148.39,2635.39 U4.22@6148.39,3065 ; 6148.39,2926.44 cw(c6163.56,2926.44) v1@6152.83,2937.17 ; 6148.39,2953.56 ccw(c6163.56,2953.56) v1@6152.83,2942.83 ; v1@6154,4675 ccw(c6144.34,4675) 6151.17,4681.83 ccw(c6158,4688.66) v1@6158,4679
  Bottom Layer w8: v1@6152.83,2942.83 ccw(c6164.49,2954.49) 6164.49,2938 ; v1@6155,2938 6405,2938 6542,3075 6542,4328 6193,4677 v1@6155,4677 ; v1(6158,4675) 6158,4676 v1@6159,4677 ; v1@6160.83,4672.17 cw(c6172.49,4660.51) 6172.49,4677
  other v1: 6150,2940
A6: NU1.50 U2.19 U4.21 | length 3616.6
  Top Layer w8: v1@4791.17,4639.17 cw(c4784.17,4632.17) 4794.07,4632.17 ; U2.19@4791.33,4545.42 ccw(c4784.72,4552.04) 4794.07,4552.04 ccw(c4803.42,4552.04) U2.19@4796.81,4545.42 ; U2.19@4794.07,4523 v1@4794.07,4642.07 ; 4794.07,4632.51 cw(c4803.49,4632.51) v1@4796.83,4639.17 ; NU1.50@5133.65,3399.37 5138.99,3399.37 5174.62,3435 v1(5508,3435) ; NU1.50@5160.1,3427.73 ccw(c5160.1,3445.23) 5172.47,3432.85 ; v1@5505.17,3432.17 ccw(c5498.34,3425.34) 5498.34,3435 ccw(c5498.34,3444.66) v1@5505.17,3437.83 ; v1@5862,3553 5940,3553 v1(6124,3369) 6128.7,3364.3 U4.21@6128.7,3065 ; v1@5863.83,3558.83 ccw(c5877.9,3572.9) 5877.9,3553 ; v1@6120,3369 ccw(c6110.34,3369) 6117.17,3375.83 ccw(c6124,3382.66) v1@6124,3373 ; v1@6121.17,3366.17 cw(c6103,3348) 6128.7,3348
  Bottom Layer w8: v1@4791.17,4639.17 cw(c4784.34,4632.34) 4794,4632.34 cw(c4803.66,4632.34) v1@4796.83,4639.17 ; v1(4794,4642) 4794,4432 5674,3552 v1@5862,3552 ; v1(5508,3435) 5514,3441 5524,3441 ; v1@5511.6,3433.25 cw(c5524,3427.2) 5524,3441 ; 5841.69,3552 ccw(c5841.69,3575.31) v1@5858.17,3558.83 ; 6109.51,3367 ccw(c6109.51,3383.49) v1@6121.17,3371.83 ; v1@6125,3367 5598,3367 5524,3441
  other v1: 5861,3556
A7: NU1.53 U2.20 U4.20 | length 3758.4
  Top Layer w8: U2.20@4759.83,4545.42 ccw(c4753.22,4552.04) 4762.57,4552.04 ccw(c4771.93,4552.04) U2.20@4765.31,4545.42 ; v1@4760.17,4639.17 cw(c4754.37,4633.37) 4762.57,4633.37 ; U2.20@4762.57,4523 v1@4762.57,4642.43 ; 4762.57,4631.31 cw(c4773.69,4631.31) v1@4765.83,4639.17 ; NU1.53@5091.89,3441.13 5094.13,3441.13 5139,3486 5562,3486 5740,3308 5740,3246 v1(5743,3243) ; NU1.53@5118.34,3469.48 ccw(c5118.34,3479.5) 5125.42,3472.42 ; 5740,3259.9 ccw(c5759.9,3259.9) v1@5745.83,3245.83 ; v1(5859,3529) 5935,3529 6112,3352 6112,3299 6107,3294 6109.02,3291.99 U4.20@6109.02,3065 ; v1@5861.83,3526.17 cw(c5868.66,3519.34) 5868.66,3529 cw(c5868.66,3538.66) v1@5861.83,3531.83 ; v1@6106.17,3290.17 cw(c6099.31,3283.31) 6109.01,3283.31 ; v1@6106.17,3295.83 ccw(c6092.1,3309.9) 6112,3309.9 ; 6109.02,3283.38 cw(c6118.62,3283.38) v1@6111.83,3290.17
  Bottom Layer w8: v1@4760.17,4639.17 cw(c4753.34,4632.34) 4763,4632.34 cw(c4772.66,4632.34) v1@4765.83,4639.17 ; v1(4763,4642) 4763,4434 5666,3531 v1@5858,3531 ; v1(5743,3243) 6055,3243 v1@6104,3292 ; v1@5745.83,3240.17 cw(c5752.66,3233.34) 5752.66,3243 cw(c5752.66,3252.66) v1@5745.83,3245.83 ; 5844.51,3531 cw(c5844.51,3514.51) v1@5856.17,3526.17 ; 6095.34,3283.34 cw(c6109,3269.69) v1@6109,3289
  other v1: 6109,3293
A8: NU1.54 U2.21 U4.10 | length 3237.8
  Top Layer w8: v1@4727.17,4638.17 cw(c4717.74,4628.74) 4731.08,4628.74 ; U2.21@4728.34,4545.42 ccw(c4721.73,4552.04) 4731.08,4552.04 ccw(c4740.43,4552.04) U2.21@4733.82,4545.42 ; U2.21@4731.08,4523 v1@4731.08,4640.08 ; NU1.54@5077.97,3455.05 5083.32,3455.05 5128.26,3500 5598,3500 5774,3324 v1@5774,3218 ; NU1.54@5104.42,3483.4 ccw(c5104.42,3500.91) 5116.8,3488.53 ; v1@5643,3451 ccw(c5633.34,3451) 5640.17,3457.83 ccw(c5647,3464.66) v1@5647,3455 ; v1@5647,3447 cw(c5647,3437.34) 5653.83,3444.17 cw(c5660.66,3451) v1@5651,3451 ; v1@5770.17,3223.83 ccw(c5760.93,3233.07) 5774,3233.07 ; v1@5839,2953 5862,2953 5911,3002 U4.10@5911,3038 ; v1@5840.83,2950.17 cw(c5847.66,2943.34) 5847.66,2953 cw(c5847.66,2962.66) v1@5840.83,2955.83 ; 5912.16,3031 U4.10@5912.16,3065
  Bottom Layer w8: v1@4727.17,4638.17 cw(c4720.34,4631.34) 4730,4631.34 cw(c4739.66,4631.34) v1@4732.83,4638.17 ; v1(4730,4641) 4730,4437 5674,3493 5674,3472 5653,3451 v1(5647,3451) ; v1@5647,3455 ccw(c5647,3479.14) 5664.07,3462.07 ; v1@5770.17,3218.17 cw(c5763.34,3211.34) 5773,3211.34 cw(c5782.66,3211.34) v1@5775.83,3218.17 ; 5773,3007 v1(5773,3221) ; 5774,3008 5774,2994 5815,2953 v1@5839,2953 ; v1@5835.17,2950.17 ccw(c5828.34,2943.34) 5828.34,2953 ccw(c5828.34,2962.66) v1@5835.17,2955.83
  other v1: 5838,2953
A9: NU1.55 U2.22 U4.9 | length 3147.9
  Top Layer w8: v1@4696.17,4638.17 cw(c4687.94,4629.94) 4699.58,4629.94 ; U2.22@4696.84,4545.42 ccw(c4690.23,4552.04) 4699.58,4552.04 ccw(c4708.93,4552.04) U2.22@4702.32,4545.42 ; U2.22@4699.58,4523 v1@4699.58,4639.42 ; 4699.58,4632.75 cw(c4707.25,4632.75) v1@4701.83,4638.17 ; NU1.55@5064.05,3471.05 NU1.55@5064.05,3468.97 5111.08,3516 5615,3516 5810,3321 v1@5810,3221 ; 5641.76,3489.24 cw(c5631.51,3479) v1@5646,3479 ; v1@5650,3475 cw(c5650,3460.51) 5660.24,3470.76 ; v1@5805.17,3223.83 ccw(c5793.51,3235.49) 5810,3235.49 ; v1@5836,2975 5857,2975 5891,3009 U4.9@5891,3037 ; v1@5839.83,2980.83 ccw(c5853.9,2994.9) 5853.9,2975 ; 5892.48,3033.48 U4.9@5892.48,3065
  Bottom Layer w8: v1@4696.17,4638.17 cw(c4689.34,4631.34) 4699,4631.34 cw(c4708.66,4631.34) v1@4701.83,4638.17 ; v1(4699,4641) 4699,4443 5650,3492 v1@5650,3481 ; v1@5647.17,3481.83 ccw(c5640.34,3488.66) 5650,3488.66 ccw(c5659.66,3488.66) v1@5652.83,3481.83 ; v1@5805.17,3218.17 cw(c5798.34,3211.34) 5808,3211.34 cw(c5817.66,3211.34) v1@5810.83,3218.17 ; v1(5808,3221) 5808,2996 5824,2980 ; v1@5833.96,2975.41 ccw(c5824,2966.92) 5824,2980 ; v1@5839,2980 5824,2980
  other v1: 5837,2978 5650,3479
A10: NU1.56 U2.23 U4.8 | length 2741.8
  Top Layer w8: U2.23@4695,4094.51 U2.23@4699.58,4089.93 v1@4699.58,4180.58 ; U2.23@4696.84,4112.35 ccw(c4690.23,4118.97) 4699.58,4118.97 ccw(c4708.93,4118.97) U2.23@4702.32,4112.35 ; v1@4697.17,4178.17 cw(c4691.35,4172.35) 4699.58,4172.35 ; 4699.58,4170.33 cw(c4710.67,4170.33) v1@4702.83,4178.17 ; NU1.56@5050.13,3482.89 5055.48,3482.89 5107.59,3535 5624,3535 5836,3323 v1@5836,3219 ; NU1.56@5076.58,3511.24 ccw(c5076.58,3528.75) 5088.96,3516.37 ; 5553.93,3535 ccw(c5553.93,3548.07) v1@5563.17,3538.83 ; v1@5568.83,3538.83 ccw(c5578.07,3548.07) 5578.07,3535 ; v1@5833.17,3220.83 ccw(c5826.34,3227.66) 5836,3227.66 ccw(c5845.66,3227.66) v1@5838.83,3220.83 ; v1(5836,3003) 5836.41,3003 5872.8,3039.38 U4.8@5872.8,3065 ; v1@5836,3007 ccw(c5836,3017.65) 5843.53,3010.12 ; v1@5840,3003 cw(c5848.67,3003) 5842.54,3009.13
  Bottom Layer w8: v1(4700,4181) 4762,4243 4873,4243 5566,3550 v1(5566,3536) ; v1@4700,4185 ccw(c4700,4194.66) 4706.83,4187.83 ccw(c4713.66,4181) v1@4704,4181 ; v1@5563.17,3538.83 ccw(c5556.34,3545.66) 5566,3545.66 ccw(c5575.66,3545.66) v1@5568.83,3538.83 ; v1@5833.17,3005.83 ccw(c5826.34,3012.66) 5836,3012.66 ccw(c5845.66,3012.66) v1@5838.83,3005.83 ; v1@5833.17,3215.17 cw(c5826.34,3208.34) 5836,3208.34 cw(c5845.66,3208.34) v1@5838.83,3215.17 ; v1(5836,3003) 5836,3161 ; 5836,3156 5836,3161 ; v1(5836,3218) 5836,3161
A11: NU1.57 U2.24 U4.7 | length 2489.9
  Top Layer w8: v1@4728.17,4159.17 cw(c4721.15,4152.15) 4731.08,4152.15 ; U2.24@4728.34,4112.35 ccw(c4721.73,4118.97) 4731.08,4118.97 ccw(c4740.43,4118.97) U2.24@4733.82,4112.35 ; 4731.08,4152.53 cw(c4740.47,4152.53) v1@4733.83,4159.17 ; v1@4731.08,4162.92 U2.24@4731.08,4089.93 4731.08,4099.92 U2.24@4733,4101.84 ; NU1.57@5036.21,3496.81 5097.4,3558 5640,3558 5865,3333 5865,3217 ; v1@5513.17,3555.17 ccw(c5506.34,3548.34) 5506.34,3558 ccw(c5506.34,3567.66) v1@5513.17,3560.83 ; v1@5518.83,3555.17 cw(c5525.66,3548.34) 5525.66,3558 cw(c5525.66,3567.66) v1@5518.83,3560.83 ; U4.7@5853.11,3065 5853.11,3142.11 5866,3155 5866,3216
  Bottom Layer w8: v1(4731,4162) 4788,4219 4873,4219 5516,3576 v1@5516,3557 ; v1@4731,4166 ccw(c4731,4175.66) 4737.83,4168.83 ccw(c4744.66,4162) v1@4735,4162 ; v1@5513.17,3560.83 ccw(c5506.34,3567.66) 5516,3567.66 ccw(c5525.66,3567.66) v1@5518.83,3560.83
  other v1: 5516,3558
A12: NU1.87 U2.25 U4.6 | length 2634.2
  Top Layer w8: v1@4350,3658 cw(c4350,3647.29) 4357.57,3654.86 ; v1@4350.44,3662 NU1.87@4501.71,3510.73 v1@4619.44,3393 ; v1@4354,3662 ccw(c4362.6,3662) 4356.52,3655.92 ; 4608.79,3403.64 ccw(c4620,3414.85) v1@4620,3399 ; U2.25@4759.83,4067.5 cw(c4753.22,4060.89) 4762.57,4060.89 cw(c4771.93,4060.89) U2.25@4765.31,4067.5 ; v1@4760.17,4010.83 ccw(c4754.37,4016.63) 4762.57,4016.63 ; v1@4762.57,4008.43 U2.25@4762.57,4089.93 ; 4762.57,4018.69 ccw(c4773.69,4018.69) v1@4765.83,4010.83 ; v1(5538,3273) 5659.43,3273 5732.43,3200 5789,3200 5833.43,3155.57 U4.6@5833.43,3065 ; v1@5540.83,3270.17 cw(c5547.66,3263.34) 5547.66,3273 cw(c5547.66,3282.66) v1@5540.83,3275.83
  Bottom Layer w8: v1@4347.17,3664.83 ccw(c4340.34,3671.66) 4350,3671.66 ccw(c4359.66,3671.66) v1@4352.83,3664.83 ; v1(4350,3662) 4350,3815 4544,4009 v1@4764,4009 ; v1(4620,3395) 4621,3394 5420,3394 v1@5539,3275 ; v1@4622.83,3397.83 ccw(c4632.07,3407.07) 4632.07,3394 ; 4750.93,4009 cw(c4750.93,3995.93) v1@4760.17,4005.17 ; 5529.05,3284.95 cw(c5517.1,3273) v1@5534,3273
  other v1: 4763,4008
A13: NU1.88 U2.26 U4.5 | length 2736.5
  Top Layer w8: v1@4323.6,3661 v1@4612.6,3372 ; v1@4324,3657 cw(c4324,3648.32) 4330.14,3654.46 ; v1@4328,3661 ccw(c4338.63,3661) 4331.11,3653.48 ; NU1.88@4487.79,3491.46 NU1.88@4487.79,3496.81 ; 4603.78,3380.82 ccw(c4613,3390.04) v1@4613,3377 ; v1@4791.17,4023.83 ccw(c4784.17,4030.83) 4794.07,4030.83 ; U2.26@4791.33,4067.5 cw(c4784.72,4060.89) 4794.07,4060.89 cw(c4803.42,4060.89) U2.26@4796.81,4067.5 ; v1@4794.07,4018.07 U2.26@4794.07,4089.93 ; 4794.07,4030.49 ccw(c4803.49,4030.49) v1@4796.83,4023.83 ; v1(5522,3254) 5642,3254 5710,3186 5776,3186 5813.74,3148.26 U4.5@5813.74,3065 ; v1@5524.83,3251.17 cw(c5531.66,3244.34) 5531.66,3254 cw(c5531.66,3263.66) v1@5524.83,3256.83
  Bottom Layer w8: v1@4321.17,3663.83 ccw(c4314.34,3670.66) 4324,3670.66 ccw(c4333.66,3670.66) v1@4326.83,3663.83 ; v1(4324,3661) 4324,3821 4532,4029 4787,4029 v1@4791,4025 ; v1(4613,3373) 5408,3373 ; v1@4615.83,3370.17 cw(c4622.66,3363.34) 4622.66,3373 cw(c4622.66,3382.66) v1@4615.83,3375.83 ; 4765.03,4029 cw(c4765.03,3992.03) v1@4791.17,4018.17 ; 4784.34,4029 cw(c4784.34,4011.34) v1@4796.83,4023.83 ; 5405,3373 v1@5523,3255 ; 5513.76,3264.24 cw(c5503.51,3254) v1@5518,3254
  other v1: 4794,4021
A14: NU1.89 U2.27 U4.4 | length 2781.8
  Top Layer w8: v1@4297,3656 cw(c4297,3646.93) 4303.42,3653.34 ; v1@4297,3659.76 NU1.89@4473.87,3482.89 v1@4617,3339.76 ; v1@4301,3660 ccw(c4311.24,3660) 4304,3652.76 ; 4606.76,3350 ccw(c4614,3357.24) v1@4614,3347 ; 4607.34,3349.42 cw(c4600.93,3343) v1@4610,3343 ; v1@4822.17,4029.83 ccw(c4813.98,4038.02) 4825.57,4038.02 ; U2.27@4822.83,4067.5 cw(c4816.21,4060.89) 4825.57,4060.89 cw(c4834.92,4060.89) U2.27@4828.31,4067.5 ; v1@4825.57,4024.57 U2.27@4825.57,4089.93 ; 4825.57,4035.29 ccw(c4833.29,4035.29) v1@4827.83,4029.83 ; v1(5495,3234) 5637,3234 5706,3165 5758,3165 5794.06,3128.95 U4.4@5794.06,3065 ; v1@5497.83,3231.17 cw(c5504.66,3224.34) 5504.66,3234 cw(c5504.66,3243.66) v1@5497.83,3236.83
  Bottom Layer w8: v1@4294.17,3662.83 ccw(c4287.34,3669.66) 4297,3669.66 ccw(c4306.66,3669.66) v1@4299.83,3662.83 ; v1(4297,3660) 4297,3827 4513,4043 4809,4043 v1(4825,4027) ; v1(4614,3343) 5391,3343 v1@5498,3236 ; v1@4616.83,3340.17 cw(c4623.66,3333.34) 4623.66,3343 cw(c4623.66,3352.66) v1@4616.83,3345.83 ; v1@4821,4027 ccw(c4811.34,4027) 4818.17,4033.83 ccw(c4825,4040.66) v1@4825,4031 ; 5484.64,3249.36 cw(c5469.27,3234) v1@5491,3234
A15: NU1.90 U2.42 U4.3 | length 3559.3
  Top Layer w8: v1@4274,3650 cw(c4274,3638.12) 4282.4,3646.52 ; v1@4274.92,3654 NU1.90@4459.95,3468.97 ; v1@4278,3654 ccw(c4285.44,3654) 4280.18,3648.74 ; NU1.90@4462.03,3468.97 NU1.90@4459.95,3468.97 ; 4600.5,3328.42 ccw(c4616,3343.92) v1@4616,3322 ; v1@4615,3317 4611.92,3317 NU1.90@4459.95,3468.97 ; v1(4856,4193) 4858,4195 5225,4195 5298.01,4121.99 U2.42@5298.01,4089.93 ; v1@4858.83,4190.17 cw(c4870.49,4178.51) 4870.49,4195 ; U2.42@5295.27,4112.35 ccw(c5288.66,4118.97) 5298.01,4118.97 ccw(c5307.36,4118.97) U2.42@5300.75,4112.35 ; v1@5465,3225 cw(c5465,3215.34) 5471.83,3222.17 cw(c5478.66,3229) v1@5469,3229 ; v1(5465,3229) 5552,3142 5748,3142 5774.37,3115.63 U4.3@5774.37,3065
  Bottom Layer w8: v1@4271.17,3656.83 ccw(c4264.34,3663.66) 4274,3663.66 ccw(c4283.66,3663.66) v1@4276.83,3656.83 ; v1(4274,3654) 4274,3836 4274,3836.2 ; 4417,3986 4274,3843 4274,3836.2 ; v1(4616,3318) 5375,3318 v1@5463,3230 ; v1@4618.83,3315.17 cw(c4625.66,3308.34) 4625.66,3318 cw(c4625.66,3327.66) v1@4618.83,3320.83 ; 4850,4168.86 cw(c4880.14,4168.86) v1@4858.83,4190.17 ; v1(4856,4193) 4850,4187 4850,4149 4765,4064 4501.8,4064 4274,3836.2 ; 5456.46,3236.54 ccw(c5465,3245.07) v1@5465,3233
A16: NU1.80 U2.43 U4.54 U5.16 | length 4131.7
  Top Layer w8: U5.16@3820.79,3626.21 3768,3573.42 3768,3340 3991,3117 v1@4184,3117 ; 4168.1,3117 cw(c4168.1,3097.1) v1@4182.17,3111.17 ; NU1.80@4625.59,3579.81 cw(c4625.59,3563.88) 4636.85,3575.15 ; v1@4781,3415 4781,3431 4603.83,3608.17 NU1.80@4599.14,3608.17 4495,3712.31 4495,3839 4598,3942 5744,3942 5774.37,3911.63 U4.54@5774.37,3813.03 ; 4781,3430.9 ccw(c4800.9,3430.9) v1@4786.83,3416.83 ; U2.43@5326.76,4112.35 ccw(c5320.15,4118.97) 5329.5,4118.97 ccw(c5338.86,4118.97) U2.43@5332.24,4112.35 ; U2.43@5329.5,4089.93 5329.5,4184.5 5346,4201 5471,4201 5538,4134 5538,3942
  Bottom Layer w8: v1@4185,3117 4219,3117 4517,3415 4783,3415 v1(4784,3414) ; v1@4187.83,3111.17 cw(c4201.9,3097.1) 4201.9,3117 ; 4771.93,3415 cw(c4771.93,3401.93) v1@4781.17,3411.17
  other v1: 4185,3114
A17: NU1.81 U2.44 U4.19 U5.17 | length 4787.7
  Top Layer w8: U5.17@3834.71,3612.29 3785,3562.58 3785,3344 3992,3137 v1@4195,3137 ; 4185.93,3137 ccw(c4185.93,3150.07) v1@4195.17,3140.83 ; 4710.85,3468.62 ccw(c4722,3479.77) v1@4722,3464 ; v1@4720.73,3458.73 4475,3704.47 4475,3849 4582,3956 5308,3956 5314,3962 5333,3962 5361,3990 U2.44@5361,4089.93 ; U2.44@5358.26,4067.5 cw(c5351.65,4060.89) 5361,4060.89 cw(c5370.35,4060.89) U2.44@5363.74,4067.5 ; v1@6086.17,3326.17 cw(c6078.55,3318.55) 6089.33,3318.55 ; v1(6089,3329) 6089.33,3324.33 U4.19@6089.33,3065 ; 6089.33,3320.14 cw(c6097.86,3320.14) v1@6091.83,3326.17
  Bottom Layer w8: v1@4195,3136 4519,3460 5432,3460 5558,3334 6094,3334 v1@6094,3330 ; v1@4202,3138 cw(c4214.07,3138) 4205.54,3146.54 ; v1@4719.17,3457.17 ccw(c4712.34,3450.34) 4712.34,3460 ccw(c4712.34,3469.66) v1@4719.17,3462.83 ; v1@4724.83,3457.17 cw(c4731.66,3450.34) 4731.66,3460 cw(c4731.66,3469.66) v1@4724.83,3462.83 ; 6067.27,3334 cw(c6067.27,3307.27) v1@6086.17,3326.17
  other v1: 4198,3138 4722,3460
A18: NU1.82 U2.28 U4.18 | length 2793.6
  Top Layer w8: 4710.73,3440.9 cw(c4702.82,3433) v1@4714,3433 ; 4712.25,3439.38 ccw(c4718,3445.14) v1@4718,3437 ; v1@4718.63,3433 NU1.82@4571.3,3580.33 4455,3696.63 4455,3864 4577,3986 4814,3986 4857.06,4029.06 U2.28@4857.06,4089.93 ; U2.28@4854.32,4067.5 cw(c4847.71,4060.89) 4857.06,4060.89 cw(c4866.42,4060.89) U2.28@4859.8,4067.5 ; v1@6067.17,3304.17 cw(c6061.2,3298.2) 6069.65,3298.2 ; U4.18@6069.65,3065 6069.65,3304.64 v1@6071,3306 ; 6069.64,3296.49 cw(c6080.51,3296.49) v1@6072.83,3304.17
  Bottom Layer w8: v1(4718,3433) 5423,3433 5547,3309 6067,3309 v1@6072,3304 ; v1@4720.83,3430.17 cw(c4727.66,3423.34) 4727.66,3433 cw(c4727.66,3442.66) v1@4720.83,3435.83 ; 6055.51,3309 cw(c6055.51,3292.51) v1@6067.17,3304.17
  other v1: 6070,3307